# Altium PCB OTP3.PcbDoc
Units mil, origin at the board's own origin, x right, y up, seen from the top; angles counter-clockwise.
Board outline 1785 x 515 mil, 2 copper layers (Top Layer, Bottom Layer); 25 components, 22 nets, 115 pads, 21 vias.
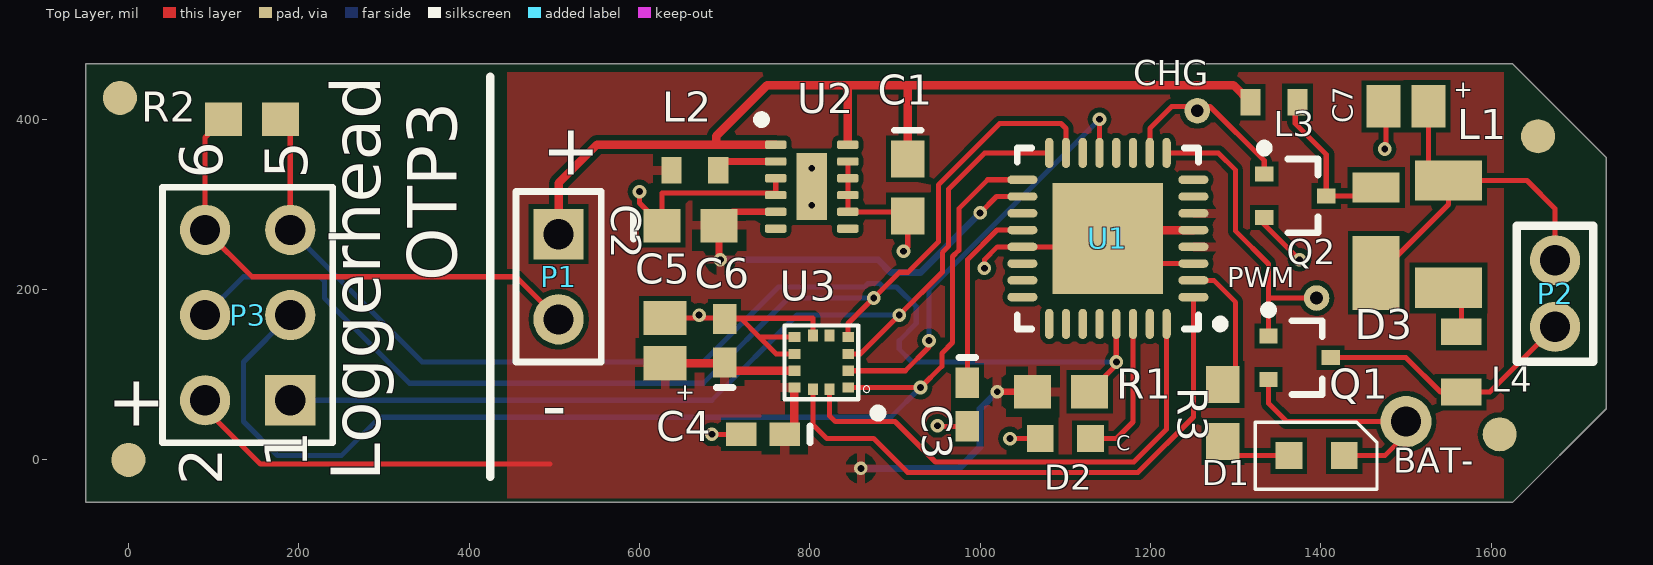
[diagram p0: Top Layer view]
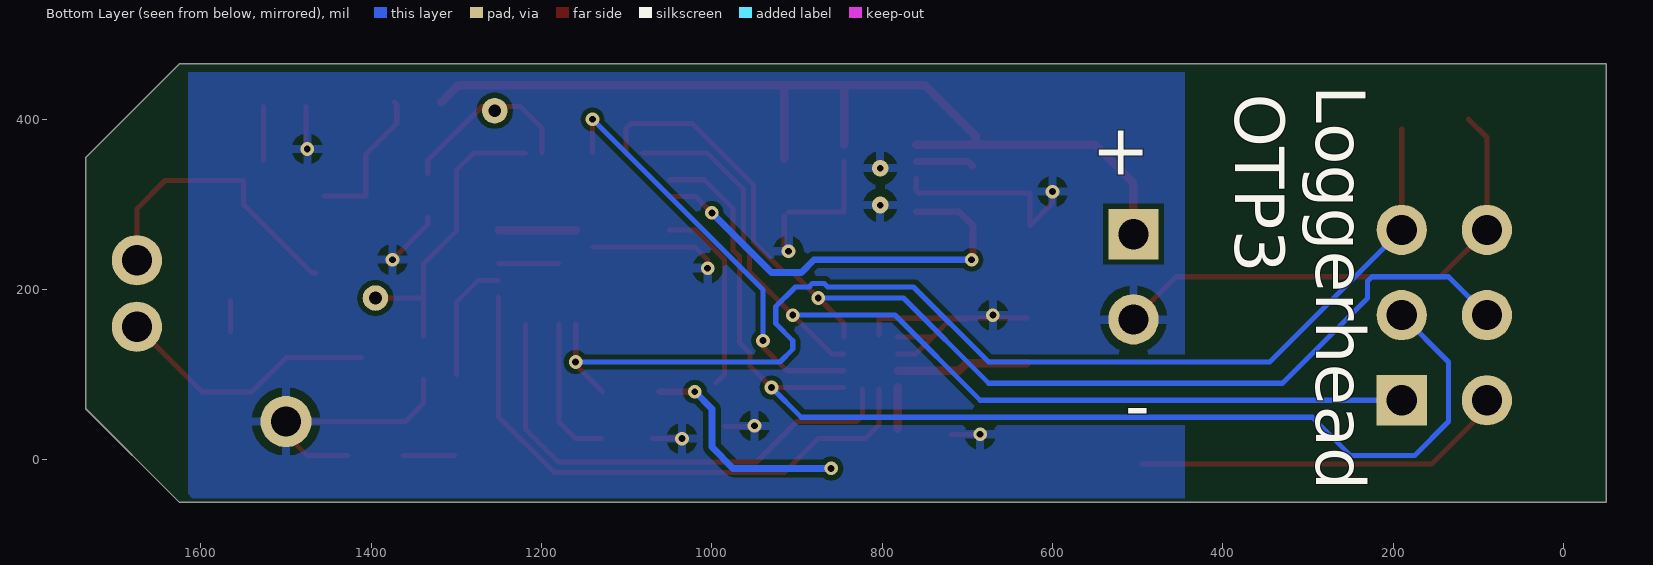
[diagram p1: Bottom Layer view, seen from below]

## Layer stack, top to bottom
Top Solder: solder mask 0.4, Solder Resist, Dk 3.5
Top Layer: signal copper 1.4
Dielectric 1: dielectric 12.6, FR-4, Dk 4.8
Bottom Layer: signal copper 1.4
Bottom Solder: solder mask 0.4, Solder Resist, Dk 3.5

## Board outline
-50,-50 1625,-50 1735,60 1735,355 1625,465 -50,465

## Design rules (kind name [scope] priority, off if disabled: settings)
Clearance [All] p1: gap=6
PolygonConnect [All] p1: connectstyle=Relief reliefconductorwidth=10 reliefentries=4 polygonreliefangle="90 Angle" airgapwidth=10
RoutingVias [All] p1: holewidth=11 width=22 viastyle="Through Hole" minholewidth=8 minwidth=12 maxholewidth=28 maxwidth=50
SolderMaskExpansion [All] p1: expansion=4
Width [All] p1: maxlimit=50 minlimit=6 preferedwidth=8
29 further rules are at their usual default settings.

## Classes and differential pairs
component class OTP3: C1 C2 C3 C4 C5 C6 C7 D1 D2 D3 L1 L4 P1 P2 P3 Q1 Q2 R1 R2 R3 U1 U2 U3

## Components (designator, comment, footprint, x,y, rotation, side; value= is the part's Value field where it differs from the comment)
C1 "C0603" 0603 915,320 r270 top
C2 "C0603" 0603 660,275 r0 top
C3 "0.1uF" 0402 985,65 r270 top
C4 "100nF" 0402 745,30 r180 top
C5 "10uF" Tant0805 630,140 r270 top
C6 "100nF" 0402 700,140 r90 top
C7 "22uF" Tant0805 1500,415 r0 top
D1 "LED_0603" Diode0603 1395,5 r0 top
D2 "638-PT1921BL41TR8" Phototransistor 1100,25 r0 top
D3 "Shottky" DFLS130 1465,255 r90 top
L1 "390uH" Inductor_NLV32T 1550,265 r270 top
L2 "2.2uH" "Inductor KLZ1608AHR" 665,340 r0 top
L3 "47uH" "Inductor KLZ1608AHR" 1345,420 r0 top
L4 "22uH" "Inductor MLZ2012M220WT000" 1565,115 r270 top
P1 "Header 2" HDR1X2 505,265 r270 top
P2 "HDR_2x1_2mm" HDR_2x1_2mm 1675,235 r180 top
P3 "AVR SPI" HDR2X3 190,70 r90 top
Q1 "PMF250XN,115" NXP-SOT323_N 1375,120 r0 top
Q2 "PMF250XN,115" NXP-SOT323_N 1370,310 r0 top
R1 "10k" 3-0603 1095,80 r180 top
R2 "omit" 3-0603 145,400 r180 top
R3 "330" 3-0603 1285,55 r270 top
U1 "ATmega8-16AC" 32M1-A_M 1150,260 r180 top
U2 "TPS62740" TPS6274x 760,370 r0 top
U3 "LIS2DS12" LGA-12 845,85 r180 top

## Footprints (in the part's own frame and the unit in brackets; to place one, negate y for a bottom-side part, rotate by r counter-clockwise, add the part's x,y. Pads: shape width x height; smd on the part's side, far side on the other; paste and mask are expansions set on the pad)
3-0603 [mm] "Chip Resistor; Body 1.6 x 0.9 mm (LxW typ)"
  rect 1.1x1 smd: 1(-0.85,0) 2(0.85,0)
32M1-A_M [mm] "QFN, 32-Leads, Body 5x5mm, Pitch 0.5mm, Thermal Pad 3.3x3.3mm, IPC Low Density"
  oval 0.9x0.25 smd: 1(-2.55,1.75) 2(-2.55,1.25) 3(-2.55,0.75) 4(-2.55,0.25) 5(-2.55,-0.25) 6(-2.55,-0.75) 7(-2.55,-1.25) 8(-2.55,-1.75) 17(2.55,-1.75) 18(2.55,-1.25) 19(2.55,-0.75) 20(2.55,-0.25) 21(2.55,0.25) 22(2.55,0.75) 23(2.55,1.25) 24(2.55,1.75)
  oval 0.25x0.9 smd: 9(-1.75,-2.55) 10(-1.25,-2.55) 11(-0.75,-2.55) 12(-0.25,-2.55) 13(0.25,-2.55) 14(0.75,-2.55) 15(1.25,-2.55) 16(1.75,-2.55) 25(1.75,2.55) 26(1.25,2.55) 27(0.75,2.55) 28(0.25,2.55) 29(-0.25,2.55) 30(-0.75,2.55) 31(-1.25,2.55) 32(-1.75,2.55)
  rect 3.3x3.3 smd: 33(0,0)
  silkscreen extent -3.48,-2.7 2.7,2.7, body extent -2.55,-2.55 2.55,2.55, height 1
0402 [mm] "Chip Capacitor; Body 1.0 x 0.5 mm (LxW typ)"
  rect 0.9x0.7 smd: 1(-0.65,0) 2(0.65,0)
  silkscreen extent -1.4,-0.25 -1.4,0.25
0603 [mm] "Chip Capacitor; Body 1.6 x 0.8 mm (LxW typ)"
  rect 1.1x1 smd: 1(-0.85,0) 2(0.85,0)
  silkscreen extent -1.7,-0.4 -1.7,0.4
DFLS130 [mm] "Diode"
  rect 0.9x1.4 smd: A(1.65,0)
  rect 2.2x1.4 smd: K(-0.9,0)
Diode0603 [mm]
  rect 0.8x0.8 smd: A(-0.825,0) K(0.825,0)
  silkscreen extent -1.83,-1 1.8,1
HDR1X2 [mm] "Connector; Header; 2 Position"
  rect 1.5x1.5 hole 0.9: 1(0,0)
  round 1.5 hole 0.9: 2(2.54,0)
  silkscreen extent -1.27,-1.27 3.81,1.27
HDR2X3 [mm] "Connector; Header; 3x2 Position"
  rect 1.5x1.5 hole 0.9: 1(0,0)
  round 1.5 hole 0.9: 2(0,2.54) 3(2.54,0) 4(2.54,2.54) 5(5.08,0) 6(5.08,2.54)
  silkscreen extent -1.27,-1.27 6.35,3.81
HDR_2x1_2mm [mm]
  round 1.5 hole 0.9: 1(0,0.016) 2(0,2)
  silkscreen extent -1.14,-1.02 1.14,3.05
"Inductor KLZ1608AHR" [mm]
  rect 0.6x0.8 smd: 1(-0.7,0) 2(0.7,0)
"Inductor MLZ2012M220WT000" [mm]
  rect 0.8x1.2 smd: 1(-0.9,0) 2(0.9,0)
Inductor_NLV32T [mm]
  rect 1.2x2 smd: 1(-1.6,0) 2(1.6,0)
LGA-12 [mm] "LIS2DS12"
  rect 0.35x0.3 smd: 1(0,0) 2(0,-0.5) 3(0,-1) 4(0,-1.5) 7(1.6,-1.5) 8(1.6,-1) 9(1.6,-0.5) 10(1.6,0)
  rect 0.3x0.35 smd: 5(0.55,-1.55) 6(1.05,-1.55) 11(1.05,0.05) 12(0.55,0.05)
  silkscreen extent -0.65,-1.85 1.9,0.35
NXP-SOT323_N [mm] "SOT23, 3-Leads, Body 2.2x1.35mm, Pitch 0.65mm, IPC Medium Density"
  rect 0.55x0.45 smd: 1(-0.925,0.65) 2(-0.925,-0.65) 3(0.925,0)
  silkscreen extent -1.05,-1.1 0.67,1.55, body extent -0.67,-1.1 0.67,1.1, height 1.1
Phototransistor [mm]
  rect 0.8x0.8 smd: C(0.75,0) E(-0.75,0)
Tant0805 [mil]
  rect 40x50 smd: 1(-26.5,0) 2(26.5,0)
TPS6274x [mm] "QFN, 12-Leads, Body 2.00x3.00mm, Pitch 0.50mm, Thermal Pad 0.90x2.00mm, IPC Medium Density"
  rrect50% 0.65x0.25 smd: 1(0,0) 2(0,-0.5) 3(0,-1) 4(0,-1.5) 5(0,-2) 6(0,-2.5) 7(2.15,-2.5) 8(2.15,-2) 9(2.15,-1.5) 10(2.15,-1) 11(2.15,-0.5) 12(2.15,0)
  rect 0.9x2 smd paste-0.1: 13(1.075,-1.25)
  silkscreen extent -0.55,0.63 -0.3,0.87, body extent 0.03,-2.8 2.12,0.3, height 0.8

## Part data
C1 C2: "Ceramic Chip Capacitor - Standard"
C3 C4 C6: library part C0402, "Ceramic Chip Capacitor - Standard"
C5 C7: library part Tant0805
D2: library part Phototransistor, "Phototransistor"
D3: library part DFLS130
L1: library part Inductor_NLV32T
L2 L3: library part "Inductor KLZ1608"
L4: library part "Inductor MLZ2012M220WT000"
P1: "Header, 2-Pin"
P3: library part "Header 3X2", "Header, 3-Pin, Dual row"
Q1 Q2: "N-Channel Trench MOSFET, 30 V, 0.9 A, -55 to 150 degC, 3-Pin SOT323, Tape and Reel"
R1 R2 R3: library part ERJ3RK, "Precision Thick Film Chip Resistor, 10 Ohm to 1M Ohm Range, 1% and 0.5% Tolerance, 0603 Size, 0.063 W"
U1: "8-Bit AVR Microcontroller with 8K Bytes of In-System Programmable Flash Memory"
U2: library part TPS6274x

## Free pads (board coordinates)
  round 40 smd paste-20 mask+5: 0(-10,425) 0(0,0) 0(1610,30) 0(1655,380)
  round 30 hole 15: 0(1255,410) 0(1395,190)
  round 60 hole 35: 0(1500,45)

## Via types
v1: diameter 16, hole 8, Top Layer to Bottom Layer, 19 vias
v2: diameter 19.68, hole 7.87, Top Layer to Bottom Layer, 2 vias

## Nets (pads, with @x,y where several pads share a name; then routed paths per layer and width w, separated by ;. In a path a pad name is that pad's centre, name@x,y a point inside that pad or via, vN(x,y) a via of type N, cw(c..) or ccw(c..) an arc to the next point about the centre after c; other vN are vias at no path point)
BAT: C1.1 L3.1 P1.1 U2.1 U2.12 | length 1160.6
  Top Layer w10: P1.1 505,325 550.24,370.24 690,370.24 ; U2.1@760,370.24 690,370.24 ; U2.12 844.65,440 ; C1.1 915,395 915,440 ; L3.1 1297.44,440 750,440 690,380 690,370.24
CHG: pad.0@1255,410 Q2.1 U1.10 | length 216
  Top Layer w6: U1.10 1199.21,389.21 1225,415 1270,415 1333.58,351.42 Q2.1
CS: U1.13 U3.2 | length 496.2
  Top Layer w6: U3.2 912.19,104.69 940,132.5 v1(940,140) ; U1.13 v1(1140.16,399.84)
  Bottom Layer w6: v1(940,140) 940,199.68 v1(1140.16,399.84)
DTR: P3.5 R1.1 R2.1 U1.29 | length 1379.1
  Top Layer w6: P3.5 R2.1@190,388.46 ; R1.1 1159.84,111.38 U1.29
  Bottom Layer w6: P3.5 345,115 675,115 763.1,203.1 864.06,203.1 867.96,207 882.04,207 885.94,203.1 901.9,203.1 925,180 925,160 905,140 905,130 920,115 v1(1160,115)
ENABLE: U1.12
GND: C1.2 C2.1 C3.2 C4.2 C5.1 C6.2 C7.1 D1.K D2.E P1.2 P3.6 pad.0@1500,45 Q1.2 Q2.2 R2.2 U1.3 U1.5 U1.21 U1.33 U2.3 U2.4 U2.8 U2.9 U2.10 U2.11 U2.13 U3.6 U3.7 U3.8 | length 2187.4
  Top Layer w6: R2.2 90,378.46 P3.6 145,215 455,215 P1.2 ; v1(600,315) 600,301.54 C2.1 626.54,313.46 757.48,313.46 760,315.98 U2.3 ; C5.1 C6.2@699.09,166.5 ; v1(685,30) C4.2 ; U3.8 760.63,124.37 740.94,144.06 ; U3.7 740.94,144.06 ; U3.6 803.66,166.34 700.75,166.34 C6.2 719.41,165.59 740.94,144.06 ; U2.11 U2.10 U2.9 U2.8 C1.2@910.28,291.26 ; v1(910,245) 915,250 C1.2 ; v1@950.59,39.41 C3.2 ; v1(1005,225) 1005,235 1020.16,250.16 U1.21 U1.33@1140.16,250.16 ; v1(1035,25) D2.E ; U1.33@1179.53,230.47 U1.3 ; Q2.2 1333.58,276.42 v1(1375,235) ; Q1.2 1338.58,66.42 1360,45 1515,45 1475,5 D1.K ; v1@1476.5,366.5 C7.1@1476.5,415
  Top Layer w10: U1.33@1159.84,269.84 U1.5
  other v1: 950,40 670,170 1475,365
  other v2: 802.32,299.13 802.32,342.44
HVDD: C7.2 D3.K L1.1 P2.1 | length 409.1
  Top Layer w6: D3.K 1469.57,219.57 1550,300 L1.1 1642.01,327.99 1675,295 P2.1 ; L1.1@1526.5,351.49 C7.2
INT1: U1.32 U3.12 | length 589.1
  Top Layer w6: U3.12 823.35,51.65 830,45 900,45 947.61,-2.61 1180.42,-2.61 1218.9,35.87 U1.32
INT2: U1.1 U3.11 | length 679.2
  Top Layer w6: U3.11 803.66,41.34 820,25 875,25 914.61,-14.61 1185.39,-14.61 1250.39,50.39 U1.1
IR: D2.C U1.30 | length 173.2
  Top Layer w6: D2.C 1160,25 1179.53,44.53 U1.30
LED1: R3.1 U1.2 | length 145.3
  Top Layer w6: U1.2 1274.21,210.79 1300,185 R3.1@1300,100
MISO: P3.1 U1.16 U3.3 | length 1143
  Top Layer w6: U3.3 859.37,124.37 v1(905,170) 955.69,220.69 955.69,243.71 963,251.03 963,318 1005.39,360.39 U1.16
  Bottom Layer w6: P3.1 685,70 785,170 v1(905,170)
MOSI: P3.4 U1.15 U3.4 | length 1348.1
  Top Layer w6: U3.4 845,160 905.25,220.25 915.25,220.25 951,256 951,322.97 1023.03,395 1095,395 1100.79,389.21 U1.15
  Bottom Layer w6: P3.4 135,215 225,215 230,210 230,190 330,90 675,90 775,190 v1(875,190)
NetC3_1: C3.1 U1.20 | length 227.6
  Top Layer w6: C3.1@995,90.59 985,100.59 985,235 1019.84,269.84 U1.20
NetD1_A: D1.A R3.2 | length 61
  Top Layer w6: R3.2@1301.54,5 D1.A
NetD3_A: D3.A L3.2 Q2.3 | length 174.8
  Top Layer w6: L3.2 1370,417.44 1370,395 1406.42,358.58 Q2.3 D3.A@1455.04,310
NetL1_2: L1.2 L4.1 | length 36.6
  Top Layer w6: L4.1 L1.2@1565,187.01
NetL2_2: L2.2 U2.2 | length 68.4
  Top Layer w8: L2.2@693.78,345 699.09,350.32 U2.2
PIEZO: L4.2 P2.2 Q1.3 | length 312.1
  Top Layer w6: Q1.3 1500,120 1540.43,79.57 L4.2 1598.31,79.57 P2.2
PWM: pad.0@1395,190 Q1.1 U1.9 | length 356.4
  Top Layer w6: U1.9 1279.61,360.39 1300,340 1300,268.58 1338.58,230 1338.58,190 ; Q1.1 1338.58,190 ; pad.0@1395,190 1338.58,190
SCK: P3.3 U1.17 U3.1 | length 1394.8
  Top Layer w6: U3.1 v1(930,85) 955,110 955,125 967.69,137.69 967.69,238.74 975,246.06 975,295 1008.9,328.9 U1.17
  Bottom Layer w6: P3.3 135,115 135,45 175,5 250,5 295,50 895,50 v1(930,85)
V1.8: C2.2 C4.1 C5.2 C6.1 L2.1 P3.2 R1.2 U1.4 U1.6 U1.18 U2.5 U3.9 U3.10 | length 1420.8
  Top Layer w6: P3.2 90,60 155,-5 495,-5 ; v1(1000,290) 1019.21,309.21 U1.18
  Top Layer w8: v1@693.46,236.54 C2.2 709.72,291.26 U2.5 ; v1(1020,80) R1.2
  Top Layer w10: C5.2 700.91,113.5 709.72,104.69 U3.9 ; C4.1@782.01,36.42 U3.10
  Bottom Layer w8: v1(695,235) 880,235 895,220 930,220 v1(1000,290) ; v1(860,-10) 975,-10 1000,15 1000,60 v1(1020,80)
pads on no net: U1.7 U1.8 U1.11 U1.14 U1.19 U1.22 U1.23 U1.24 U1.25 U1.26 U1.27 U1.28 U1.31 U2.6 U2.7 U3.5

## Polygon pours and split planes (outlines as drawn)
GND on Bottom Layer "GND" (solid, pour order 2): 445,455 1615,455 1615,-40 1610,-45 445,-45
V1.8 on Top Layer "V1.8" (solid, pour order 4): 445,455 1615,455 1615,-45 445,-45

## Silkscreen, mask and mechanical layers (free items; w line width, h text height)
Top Overlay:
  circle w10: c880,55 r5
  lines w10: 425,-20 425,450
  text "CHG" at 1180,430 h50
  text "+" at 485,335 h60
  text "OTP3" at 405,210 h100 r90
  text "PWM" at 1290,195 h40
  text "+" at -25,40 h60
  text "-" at 485,35 h60
  text "Loggerhead" at 315,-25 h100 r90
  text "BAT-" at 1485,-25 h50
Bottom Overlay:
  text "Loggerhead" at 310,440 h100 r90
  text "OTP3" at 405,430 h100 r90
  text "+" at 485,335 h60
  text "-" at 485,35 h60
Mechanical 1:
  the board outline again, w10

## Text inside footprints (layer, text, board x,y; h text height)
C5: Top Overlay "+" at 645,90 h19.68 r270
C7: Top Overlay "+" at 1556.22,425 h19.68
D2: Top Overlay "C" at 1160,5 h30
P3: Top Overlay "6" at 110,330 h50 r90; Top Overlay "5" at 210,330 h50 r90; Top Overlay "2" at 110,-30 h50 r90; Top Overlay "1" at 210,-10 h50 r90